# EAGLE board node (EAGLE 6.5.0)
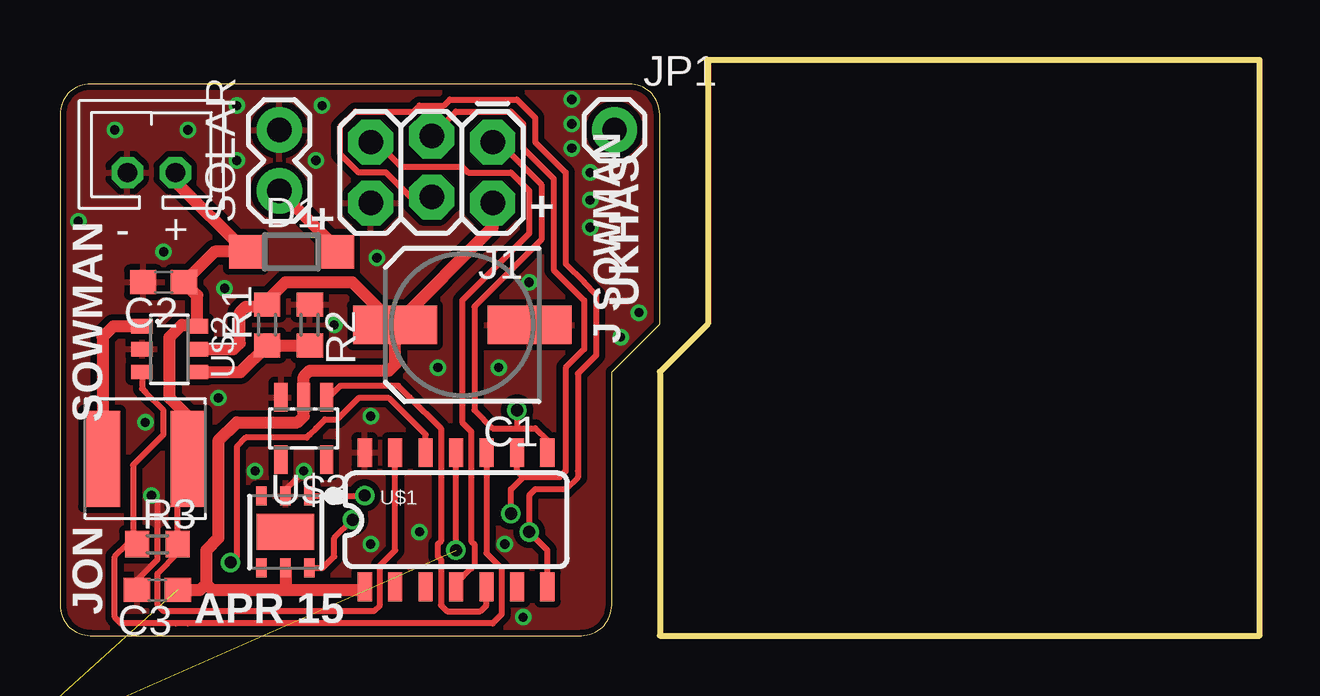
[diagram p0: board, top side]
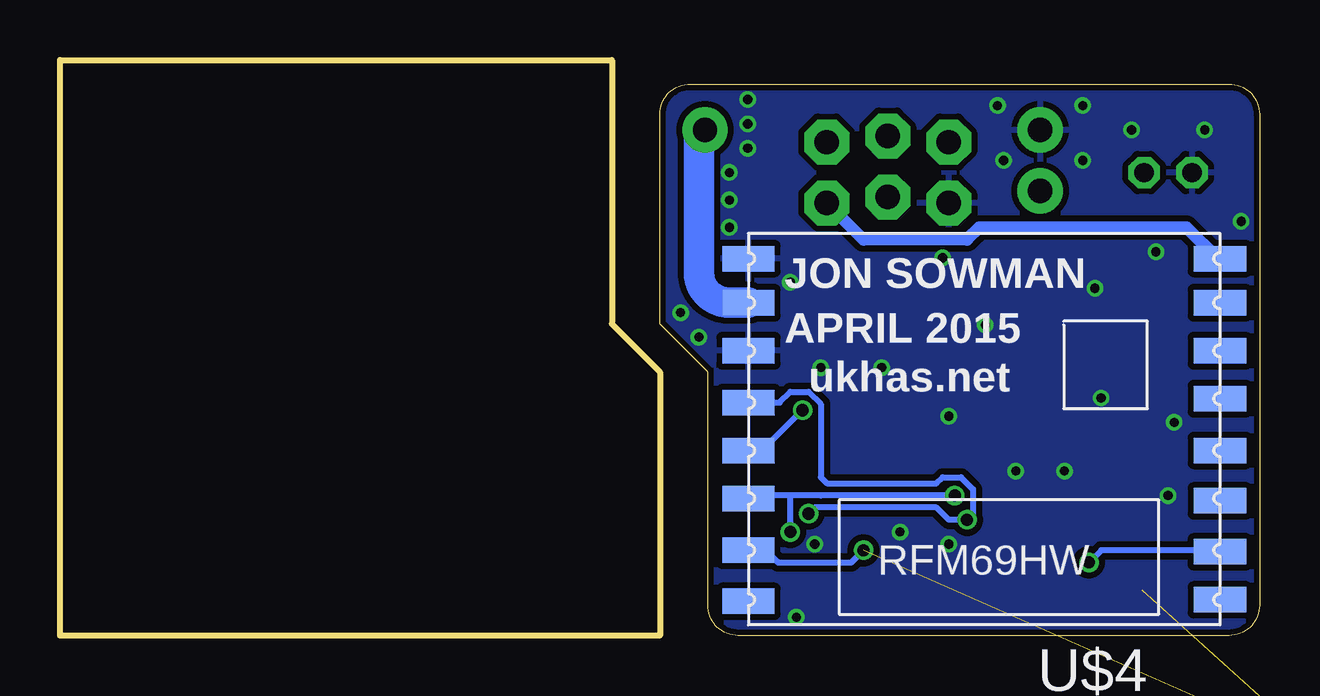
[diagram p1: board, bottom side, seen from below]

Size 50 x 24 mm. Coordinates in mm from the lower left corner, seen from the top.
Outline: 25,13 25,21.73 arc90 23.73,23 1.27,23 arc90 0,21.73 0,1.27 arc90 1.27,0 21.73,0 arc90 23,1.27 23,11 25,13
Outline: 27,24 27,13 25,11 25,0 50,0 50,24 27,24
Copper layers (1*16): Top 0.035mm / dielectric 1.5mm / Bottom 0.035mm
Design rules "SeeedStudio_rule_no_angle_090911 *": minimum track width 6mil, minimum drill 12mil, track to track 6mil, track to pad 6mil, pad to pad 6mil, via to via 6mil, smd to smd 0mil, copper to edge 10mil, drill to drill 10mil, minimum pad ring 10mil, minimum via ring 6mil, stop-mask expansion 2mil, vias tented up to drill 100mil, thermal gap 10mil

## Footprints (pad centres in the part's own frame; a part is rotated, then mirrored left to right if it is on the bottom)
SANYO-OSCON_SMD_C6 = smd 3.5 x 1.6: + 2.8,0; - -2.8,0
C0603 = smd 1.1 x 1: 1 -0.85,0; 2 0.85,0
SOD123 = smd 1.4 x 1.4: A 1.9,0; C -1.9,0
BOURNS_SRN5040_L = smd 1.5 x 4: P$1 -1.8,0; P$2 1.8,0
DFN6-L = smd 0.45 x 0.8: 1 -1,-1.5; 2 0,-1.5; 3 1,-1.5; 4 1,1.5; 5 0,1.5; 6 -1,1.5 | smd 2.4 x 1.5: EP 0,0
2X3_LOCK = drill 1.016 pad 1.88 octagon: 1 0,0; 2 0,2.54; 3 2.54,-0.254; 4 2.54,2.286; 5 5.08,0; 6 5.08,2.54
JST-2-TH = drill 0.8 octagon: 1 1,0; 2 -1,0
1X01 = drill 1.016 pad 1.88: 1 0,0
R0603 = smd 1 x 1.1: 1 -0.85,0; 2 0.85,0
1X02 = drill 1.016 pad 1.88: 1 0,0; 2 2.54,0
SO14 = smd 0.6 x 1.2: 1 -3.81,-2.8; 2 -2.54,-2.8; 3 -1.27,-2.8; 4 0,-2.8; 5 1.27,-2.8; 6 2.54,-2.8; 7 3.81,-2.8; 8 3.81,2.8; 9 2.54,2.8; 10 1.27,2.8; 11 0,2.8; 12 -1.27,2.8; 13 -2.54,2.8; 14 -3.81,2.8
SOT23-6 = smd 0.6 x 0.9: 1 -0.95,-1.15; 2 0,-1.15; 3 0.95,-1.15; 4 0.95,1.15; 5 0,1.15; 6 -0.95,1.15
SOT23-5L = smd 0.55 x 1.2: 1 -0.95,-1.3; 2 0,-1.3; 3 0.95,-1.3; 4 0.95,1.3; 5 -0.95,1.3
RFM = smd 2.184 x 1.067: ANT 19.651,2.889; DIO0 0,13.27; DIO1 0,11.143; DIO2 0,9.047; DIO3 0,6.889; DIO4 0,4.889; DIO5 0,2.889; GNDA 19.651,4.889; GNDB 19.651,1.048; MISO 19.651,9.047; MOSI 19.651,11.047; NC 19.651,15.334; NSS 19.651,13.206; RESET 0,15.27; SCK 19.651,7.048; VCC 0,1.048

## Placement (x,y rotation side)
C1  100u  [SANYO-OSCON_SMD_C6]  16.76,12.95 180 top
C2  4u7  [C0603]  4.32,14.73 180 top
C3  100n  [C0603]  4.06,1.91 180 top
D1  [SOD123]  9.65,16 0 top
DF  4u7  [BOURNS_SRN5040_L]  3.56,7.37 180 top
IC1  HTU21D  [DFN6-L]  9.4,4.32 180 top
J1  AVR_SPI_PRG_62X3_LOCK  [2X3_LOCK]  18.03,20.57 180 top
J2  [JST-2-TH]  3.81,19.3 0 top
JP1  M01PTH  [1X01]  23.11,21.08 0 top
R1  [R0603]  8.64,12.95 90 top
R2  [R0603]  10.41,12.95 270 top
R3  [R0603]  4.06,3.81 0 top
R4  [R0603]  -5.08,-6.35 0 top  (outside the outline)
SOLAR  M02PTH  [1X02]  9.14,18.54 90 top
U$1  ATTINY84  [SO14]  16.51,4.83 0 top
U$2  MCP1640  [SOT23-6]  4.57,11.94 270 top
U$3  BU49X_VDET_SOT235  [SOT23-5L]  10.16,8.64 180 top
U$4  RFM69HW  [RFM]  1.65,16.76 180 bottom

## Library data of the parts
C1-C3 R1-R4 = rcl
D1 J2 = dtb
DF U$3 = jonsowman
IC1 = Mine
J1 JP1 SOLAR = SparkFun-Connectors
U$1 = SparkFun-DigitalIC; PROD_ID: IC-11285
U$2 = ukhas
U$4 = hoperf

## Nets
DET: U$1.5 U$3.1
DIO0: U$1.12 U$4.DIO0
EN: R3.1 U$1.10 U$2.3
GND: C1.- C2.2 C3.2 IC1.2 J1.6 J2.2 R2.1 SOLAR.2 U$1.14 U$2.2 U$3.3 U$4.GNDA U$4.GNDB
MISO: J1.1 U$1.8 U$4.MISO
MOSI: IC1.1 J1.4 U$1.7 U$4.MOSI
N$1: DF.P$2 U$2.1
N$2: R1.1 R2.2 U$2.4
N$3: JP1.1 U$4.ANT
N$4: U$1.3
N$5: D1.A SOLAR.1
N$6: U$1.6
N$7: U$4.RESET
RESET: J1.5 U$1.4
RFM_SS: R4.1 U$1.11 U$4.NSS
SCK: IC1.6 J1.3 U$1.9 U$4.SCK
VBATT: C2.1 D1.C DF.P$1 J2.1 R3.2 U$1.13 U$2.6
VCC: C1.+ C3.1 IC1.5 J1.2 R1.2 R4.2 U$1.1 U$2.5 U$3.2 U$4.VCC

## Tracks (layer width: path | path; a pad name or v marks a point on that pad's centre or on a via)
DET
  Top 0.254: U$1.5 17.78,1.27 17.53,1.02 16.13,1.02 15.88,1.27 15.88,3.17 15.75,3.3 15.75,3.81 15.88,3.94 15.88,8.64 14.57,9.94 14.1,10.41 11.94,10.41 11.68,10.41 11.21,9.94 U$3.1
DIO0  (via drill 0.51)
  Top 0.254: U$1.12 15.24,8.13 15.24,8.38 14.99,8.64 14.22,9.4 13.72,9.91 12.45,9.91 11.56,9.02 11.05,9.02 10.67,8.64 10.41,8.38 10.29,8.26 7.75,8.26 7.37,7.87 7.37,6.86 7.37,4.32 7.37,3.3 v7.11,3.05
  Bottom 0.254: U$4.DIO0 1.71,3.56 6.6,3.56 v7.11,3.05
EN
  Top 0.254: U$1.10 17.78,3.43 18.41,2.79 18.41,0.89 18.03,0.51 5.33,0.51 4.83,0.51 2.54,0.51 2.29,0.76 2.29,3.3 2.79,3.81 R3.1 | 3.56,10.85 U$2.3 3.42,10.29 3.56,10.16 4.32,9.4 4.32,8.38 3.05,7.11 3.05,3.98 R3.1 | R3.1 3.3,3.81 R3.1
GND  (via drill 0.38)
  Top 0.254: IC1.2 9.4,6.1 v10.16,6.86 | C3.2 3.21,2.33 4.06,3.17 4.06,5.59 v3.81,5.84
  other vias: 18.29,11.18 11.43,12.95 6.6,9.91 8.13,6.86 12.95,3.81 14.99,4.32 21.34,22.35 23.37,12.45 22.1,19.3 22.1,17.02 12.95,9.14 13.21,15.75 15.75,11.18 7.37,19.81 10.67,19.81 2.29,21.08 5.33,21.08 0.76,17.27 3.56,8.89 19.3,0.76 6.86,14.48 4.32,16 21.34,21.34 21.34,20.32 22.1,18.16 24.13,13.46 19.56,14.73 18.54,3.81 7.37,22.1 10.92,22.1
  pour Top (isolate 0.254): 0,23.11 24.89,23.11 24.89,0 0,0
  pour Bottom (isolate 0.254): 0,23.11 24.89,23.11 24.89,0 0,0
MISO  (via drill 0.51)
  Top 0.254: U$1.8 20.32,8.13 19.81,8.64 19.05,8.64 | 19.05,8.64 18.03,8.64 17.27,9.4 17.27,13.72 20.07,16.51 20.07,18.8 18.54,20.32 18.29,20.32 J1.1 | v19.05,9.4 19.05,8.64
  Bottom 0.254: U$4.MISO 20.73,7.72 v19.05,9.4
MOSI  (via drill 0.51)
  Top 0.254: J1.4 14.61,18.29 13.59,19.3 12.45,19.3 11.68,20.07 11.68,21.21 12.32,21.84 14.73,21.84 14.99,22.1 16,22.1 16.26,22.35 19.05,22.35 19.81,21.59 19.81,20.57 21.08,19.3 21.08,15.49 21.84,14.73 22.35,14.22 22.35,11.68 21.59,10.92 21.59,6.86 21.59,6.6 21.08,6.1 19.81,6.1 19.56,5.84 v19.56,4.32 20.32,3.56 U$1.7 | IC1.1 12.68,5.82 v12.7,5.84
  Bottom 0.254: v12.7,5.84 18.29,5.84 19.56,5.84 | 19.56,5.84 21.18,5.84 U$4.MOSI | v19.56,4.32 19.56,5.84
N$1
  Top 0.508: U$2.1 2.22,12.89 1.78,12.45 1.78,8.66 1.78,7.39 DF.P$2
N$2
  Top 0.508: R2.2 R1.1 7.52,10.99 U$2.4
N$3
  Bottom 1.27: U$4.ANT 22.1,13.88 arc90 23.37,15.14 23.37,19.05 23.37,19.3 23.37,20.47 arc45 JP1.1
N$5
  Top 0.508: SOLAR.1 11.55,16.13 D1.A
RESET
  Top 0.254: U$1.4 16.51,2.16 17.14,2.79 17.27,2.92 17.27,3.81 17.14,3.94 17.14,7.49 17.14,7.62 17.14,8.51 16.76,8.89 16.76,13.97 19.56,16.76 19.56,18.54 18.8,19.3 17.02,19.3 16.76,19.56 14.22,19.56 13.21,20.57 J1.5
RFM_SS  (via drill 0.51)  (1 unrouted)
  Top 0.254: v16.51,3.56 U$1.11
  Bottom 0.254: U$4.NSS 20.58,3.56 20.07,3.05 17.02,3.05 v16.51,3.56
SCK  (via drill 0.51)
  Top 0.254: J1.3 16.51,21.84 18.8,21.84 19.3,21.34 19.3,20.32 20.57,19.05 20.57,15.24 21.84,13.97 21.84,11.94 21.08,11.18 21.08,6.86 20.83,6.6 19.3,6.6 | 19.3,6.6 19.18,6.73 19.05,6.86 U$1.9 | IC1.6 10.95,2.82 11.43,3.3 11.43,4.06 v12.19,4.83 | 19.3,6.6 18.8,6.1 v18.8,5.08
  Bottom 0.254: v18.8,5.08 18.54,5.33 13.46,5.33 12.95,4.83 v12.19,4.83 11.94,5.08 11.94,6.1 12.45,6.6 13.21,6.6 13.46,6.35 18.03,6.35 18.29,6.6 18.29,9.65 18.8,10.16 19.56,10.16 20,9.72 U$4.SCK
VBATT
  Top 0.254: U$1.13 13.97,3.56 13.34,2.92 13.34,1.27 13.08,1.02 11.56,1.02 5.33,1.02 4.32,1.02 4.06,1.27 4.06,2.58 4.91,3.43 R3.2 4.91,5.91 4.91,6.92 DF.P$1
  Top 0.508: J2.1 4.81,18.94 D1.C 6.44,16 C2.1 5.72,14.18 U$2.6 5.66,12.95 5.08,12.95 4.57,12.45 4.57,9.91 5.36,9.12 DF.P$1
VCC  (1 unrouted)
  Top 0.508: C1.+ 12.19,14.73 9.4,14.73 8.64,13.97 R1.2 8.55,13.72 7.75,13.72 7.49,13.46 7.49,12.19 7.24,11.94 U$2.5 | 6.1,2.16 6.1,3.56 6.6,4.06 6.6,8.13 7.37,8.89 9.91,8.89 10.16,9.14 U$3.2 10.16,10.79 10.41,11.05 13.72,11.05 13.97,11.3 C1.+ | 6.1,2.16 6.35,1.91 8.78,1.91 9.4,1.91 | 9.4,1.91 11.82,1.91 12.58,1.91 U$1.1 | J1.2 18.03,17.02 C1.+ | IC1.5 9.4,1.91 | C3.1 5.84,1.91 6.1,2.16
  Bottom 0.508: U$4.VCC 1.75,15.72 3.05,17.02 11.68,17.02 12.19,16.51 16.51,16.51 J1.2

## Text on the board
tPlace: SOWMAN | + | + | UKHAS | JON | APR 15
bPlace: JON SOWMAN | APRIL 2015 | ukhas.net
tNames: J SOWMAN